# EAGLE board alter (EAGLE 8.2.2)

Size 87.3 x 83.81 mm. Coordinates in mm from the lower left corner, seen from the top.
Outline: 0,0 87.3,0 87.3,83.81 0,83.81 0,0
Copper layers (1*16): Top 0.035mm / dielectric 1.5mm / Bottom 0.035mm
Design rules "default": minimum track width 6mil, minimum drill 0.35mm, track to track 6mil, track to pad 6mil, pad to pad 6mil, via to via 6mil, smd to smd 6mil, copper to edge 40mil, drill to drill 6mil, minimum pad ring 10mil, minimum via ring 8mil, stop-mask expansion 4mil, vias tented up to drill 0mil, thermal gap 10mil

## Footprints (pad centres in the part's own frame; a part is rotated, then mirrored left to right if it is on the bottom)
1X01 = drill 1.016 pad 1.93 octagon: 1 0,0
DIL08 = drill 0.813 long: 1 -3.81,-3.81; 2 -1.27,-3.81; 3 1.27,-3.81; 4 3.81,-3.81; 5 3.81,3.81; 6 1.27,3.81; 7 -1.27,3.81; 8 -3.81,3.81
UNO_R3_SHIELD = drill 1.016 pad 1.88: 3.3V 24.13,-2.54; 5V 24.13,0; A0 24.13,12.7; A1 24.13,15.24; A2 24.13,17.78; A3 24.13,20.32; A4 24.13,22.86; A5 24.13,25.4; AREF -24.13,-13.97; D2 -24.13,20.32; D3 -24.13,17.78; D4 -24.13,15.24; D5 -24.13,12.7; D6 -24.13,10.16; D7 -24.13,7.62; D8 -24.13,3.81; D9 -24.13,1.27; D10 -24.13,-1.27; D11 -24.13,-3.81; D12 -24.13,-6.35; D13 -24.13,-8.89; GND@0 24.13,2.54; GND@1 24.13,5.08; GND@2 -24.13,-11.43; IOREF 24.13,-7.62; NC 24.13,-10.16; RES 24.13,-5.08; RX -24.13,25.4; SCL -24.13,-19.05; SDA -24.13,-16.51; TX -24.13,22.86; VIN 24.13,7.62
1X04-3.5MM = drill 1 pad 2.184: 1 -5.25,0; 2 -1.75,0; 3 1.75,0; 4 5.25,0
CAP-PTH-10MM = drill 0.9 pad 1.651: 1 -5,0; 2 5,0
CPOL-RADIAL-5MM-10MM-KIT = drill 0.9 pad 1.93 square: + 2.5,0 | drill 0.9 pad 1.93: - -2.5,0
DO-1N4148 = drill 0.9: A -3.81,0; C 3.81,0
1X02 = drill 1.016 pad 1.88: 1 0,0; 2 2.54,0
DIL14 = drill 0.813 long: 1 -7.62,-3.81; 2 -5.08,-3.81; 3 -2.54,-3.81; 4 0,-3.81; 5 2.54,-3.81; 6 5.08,-3.81; 7 7.62,-3.81; 8 7.62,3.81; 9 5.08,3.81; 10 2.54,3.81; 11 0,3.81; 12 -2.54,3.81; 13 -5.08,3.81; 14 -7.62,3.81
1X03 = drill 1.016: 1 -2.54,0; 2 0,0; 3 2.54,0
LED5MM = drill 0.813 pad 1.676 octagon: A -1.27,0; K 1.27,0
0207/9 = drill 0.813 pad 1.676 octagon: 1 -4.572,0; 2 4.572,0
1X01' = drill 1.016 pad 1.88: 1 0,0
TACTILE-PTH = drill 1.016 pad 1.88: 1 -3.251,2.261; 2 3.251,2.261; 3 -3.251,-2.261; 4 3.251,-2.261
TRIM-3386 = drill 0.9 pad 1.778: 1 -2.54,-2.857; 2 0,-2.857; 3 2.54,-2.857

## Placement (x,y rotation side)
AD6_O/P  [1X01]  77.47,50.8 0 top
AD6_O/P2  [1X01]  46.99,35.56 0 top
AD620N1  AD620N  [DIL08]  76.2,59.69 180 top
AD620N2  AD620N  [DIL08]  46.99,27.94 0 top
B1  ARDUINO_UNO_R3_SHIELDBASIC  [UNO_R3_SHIELD]  57.15,43.18 90 top
BLUETOOTH  1X4-3.5MM  [1X04-3.5MM]  36.83,11.43 179.9 top
C3A  10nF  [CAP-PTH-10MM]  82.55,48.26 296.5 top
C3A1  10nF  [CAP-PTH-10MM]  43.18,40.64 90 top
C4A  1uf  [CPOL-RADIAL-5MM-10MM-KIT]  64.77,29.21 180 top
C4A1  1uf  [CPOL-RADIAL-5MM-10MM-KIT]  19.05,35.56 90 top
D1  [DO-1N4148]  72.39,48.26 0 top
D2  [DO-1N4148]  63.5,49.53 315 top
D3  [DO-1N4148]  48.26,58.42 0 top
D4  [DO-1N4148]  54.61,57.15 225 top
I/P1  [1X02]  82.55,67.31 0 bottom
I/P2  [1X02]  55.88,24.13 45 top
IC2  LM324P  [DIL14]  73.66,40.64 180 top
JP1  [1X03]  73.66,67.31 0 top
LED3  [LED5MM]  58.42,12.7 0 top
LED4  [LED5MM]  68.58,12.7 0 top
OPAMP2  LM324P  [DIL14]  33.02,52.07 90 top
R1  20  [0207/9]  83.82,59.69 270 top
R2  20  [0207/9]  39.37,27.94 90 top
R2A  80k  [0207/9]  57.15,41.91 323.2 top
R2A1  80k  [0207/9]  25.4,57.15 90 top
R6A  1k  [0207/9]  72.39,29.21 90 top
R6A1  1k  [0207/9]  24.13,24.13 315 top
R7A  150k  [0207/9]  69.85,50.8 180 top
R7A1  150k  [0207/9]  48.26,44.45 298 top
R8A  150k  [0207/9]  66.04,54.61 0 top
R8A1  150k  [0207/9]  40.64,49.53 90 top
R9A  150k  [0207/9]  59.69,45.72 296.5 top
R9A1  150k  [0207/9]  45.72,53.34 135 top
R10A  150k  [0207/9]  64.77,58.42 180 top
R10A1  150k  [0207/9]  44.45,62.23 180 top
R11A  150k  [0207/9]  54.61,52.07 225 top
R11A1  150k  [0207/9]  33.02,63.5 180 top
R13A  180k  [0207/9]  55.88,35.56 180 top
R13A1  180k  [0207/9]  21.59,46.99 270 top
RECTIFY  [1X01]  63.5,45.72 0 top
RECTIFY1  [1X01]  25.4,48.26 0 top
REF  [1X01']  55.88,29.21 0 top
RESET  [TACTILE-PTH]  49.53,12.7 0 top
SMOOTH  [1X01]  55.88,39.37 0 top
SMOOTH1  [1X01]  25.4,39.37 0 top
TM1  [TRIM-3386]  78.74,29.21 180 top
TM2  [TRIM-3386]  30.48,30.48 180 top

## Library data of the parts
AD6_O/P AD6_O/P2 BLUETOOTH D1-D4 JP1 LED3 LED4 R1 R2 R2A R2A1 R6A R6A1 R7A R7A1 R8A R8A1 R9A R9A1 R10A R10A1 R11A R11A1 R13A R13A1 RECTIFY RECTIFY1 SMOOTH SMOOTH1 TM1 TM2 = adafruit
AD620N1 AD620N2 = analog-devices; MF: ALTERA CORPORATION; MPN: AD620AN; OC_FARNELL: 1523782; OC_NEWARK: 05F7108
B1 = SparkFun-Boards
C3A C3A1 = SparkFun-Capacitors; PROD_ID: CAP-09321
C4A C4A1 = SparkFun-Capacitors; PROD_ID: CAP-09538
I/P1 I/P2 REF = SparkFun-Connectors
IC2 OPAMP2 = lm324
RESET = SparkFun-Retired

## Nets
GND: AD620N1.5 AD620N2.5 B1.GND@0 B1.GND@1 B1.GND@2 BLUETOOTH.3 IC2.3 IC2.10 IC2.12 JP1.2 LED3.K LED4.K OPAMP2.3 OPAMP2.10 OPAMP2.12 REF.1 RESET.3 RESET.4
N$1: AD620N1.7 AD620N2.7 IC2.4 JP1.1 OPAMP2.4
N$3: AD620N1.2 I/P1.1
N$4: AD620N1.3 I/P1.2
N$5: AD620N1.1 R1.1
N$6: AD620N1.8 R1.2
N$7: AD6_O/P.1 AD620N1.6 C3A.1
N$8: C3A.2 R7A.1
N$9: IC2.2 R7A.2 R8A.1 R9A.1
N$10: D1.A R8A.2 R10A.1
N$11: D1.C D2.A IC2.1
N$12: IC2.7 R2A.1 R11A.2 RECTIFY.1
N$13: IC2.6 R10A.2 R11A.1
N$15: C4A.+ IC2.9 R2A.2 R13A.1
N$16: C4A.- IC2.8 R6A.1 R13A.2 SMOOTH.1
N$17: IC2.13 R6A.2 TM1.3
N$18: B1.A0 IC2.14 TM1.2
N$19: AD620N1.4 AD620N2.4 IC2.11 JP1.3 OPAMP2.11
N$21: AD620N2.1 R2.1
N$22: AD620N2.8 R2.2
N$23: AD6_O/P2.1 AD620N2.6 C3A1.1
N$24: C3A1.2 R7A1.1
N$25: OPAMP2.2 R7A1.2 R8A1.1 R9A1.1
N$26: D3.A R8A1.2 R10A1.1
N$27: D3.C D4.A OPAMP2.1
N$28: OPAMP2.7 R2A1.1 R11A1.2 RECTIFY1.1
N$29: OPAMP2.6 R10A1.2 R11A1.1
N$30: C4A1.+ OPAMP2.9 R2A1.2 R13A1.1
N$31: C4A1.- OPAMP2.8 R6A1.1 R13A1.2 SMOOTH1.1
N$32: OPAMP2.13 R6A1.2 TM2.3
N$34: AD620N2.3 I/P2.2
N$35: B1.TX BLUETOOTH.1
N$36: B1.RX BLUETOOTH.2
N$37: B1.D11 RESET.1 RESET.2
N$38: B1.5V BLUETOOTH.4
N$39: B1.D12 LED3.A
N$40: B1.D13 LED4.A
N$41: D2.C IC2.5 R9A.2
N$42: B1.A5 OPAMP2.14 TM2.2
N$44: D4.C OPAMP2.5 R9A1.2
N$50: AD620N2.2 I/P2.1

## Tracks (layer width: path | path; a pad name or v marks a point on that pad's centre or on a via)
GND  (17 unrouted)
N$1  (4 unrouted)
N$3  (1 unrouted)
N$4  (1 unrouted)
N$5  (1 unrouted)
N$6  (1 unrouted)
N$7  (2 unrouted)
N$8  (1 unrouted)
N$9  (3 unrouted)
N$10  (2 unrouted)
N$11  (2 unrouted)
N$12  (3 unrouted)
N$13  (2 unrouted)
N$15  (3 unrouted)
N$16  (4 unrouted)
N$17  (2 unrouted)
N$18  (2 unrouted)
N$19  (4 unrouted)
N$21  (1 unrouted)
N$22  (1 unrouted)
N$23  (2 unrouted)
N$24  (1 unrouted)
N$25  (3 unrouted)
N$26  (2 unrouted)
N$27  (2 unrouted)
N$28  (3 unrouted)
N$29  (2 unrouted)
N$30  (3 unrouted)
N$31  (4 unrouted)
N$32  (2 unrouted)
N$34  (1 unrouted)
N$35  (1 unrouted)
N$36  (1 unrouted)
N$37  (2 unrouted)
N$38  (1 unrouted)
N$39  (1 unrouted)
N$40  (1 unrouted)
N$41  (2 unrouted)
N$42  (2 unrouted)
N$44  (2 unrouted)
N$50  (1 unrouted)